# Altium PCB ESP32C3_REMOTE_SWITCH_PCB.PcbDoc
Units mm, origin at the board's own origin, x right, y up, seen from the top; angles counter-clockwise.
Board outline 35.18 x 25.53 mm, 2 copper layers (Top Layer, Bottom Layer); 39 components, 28 nets, 125 pads, 73 vias.
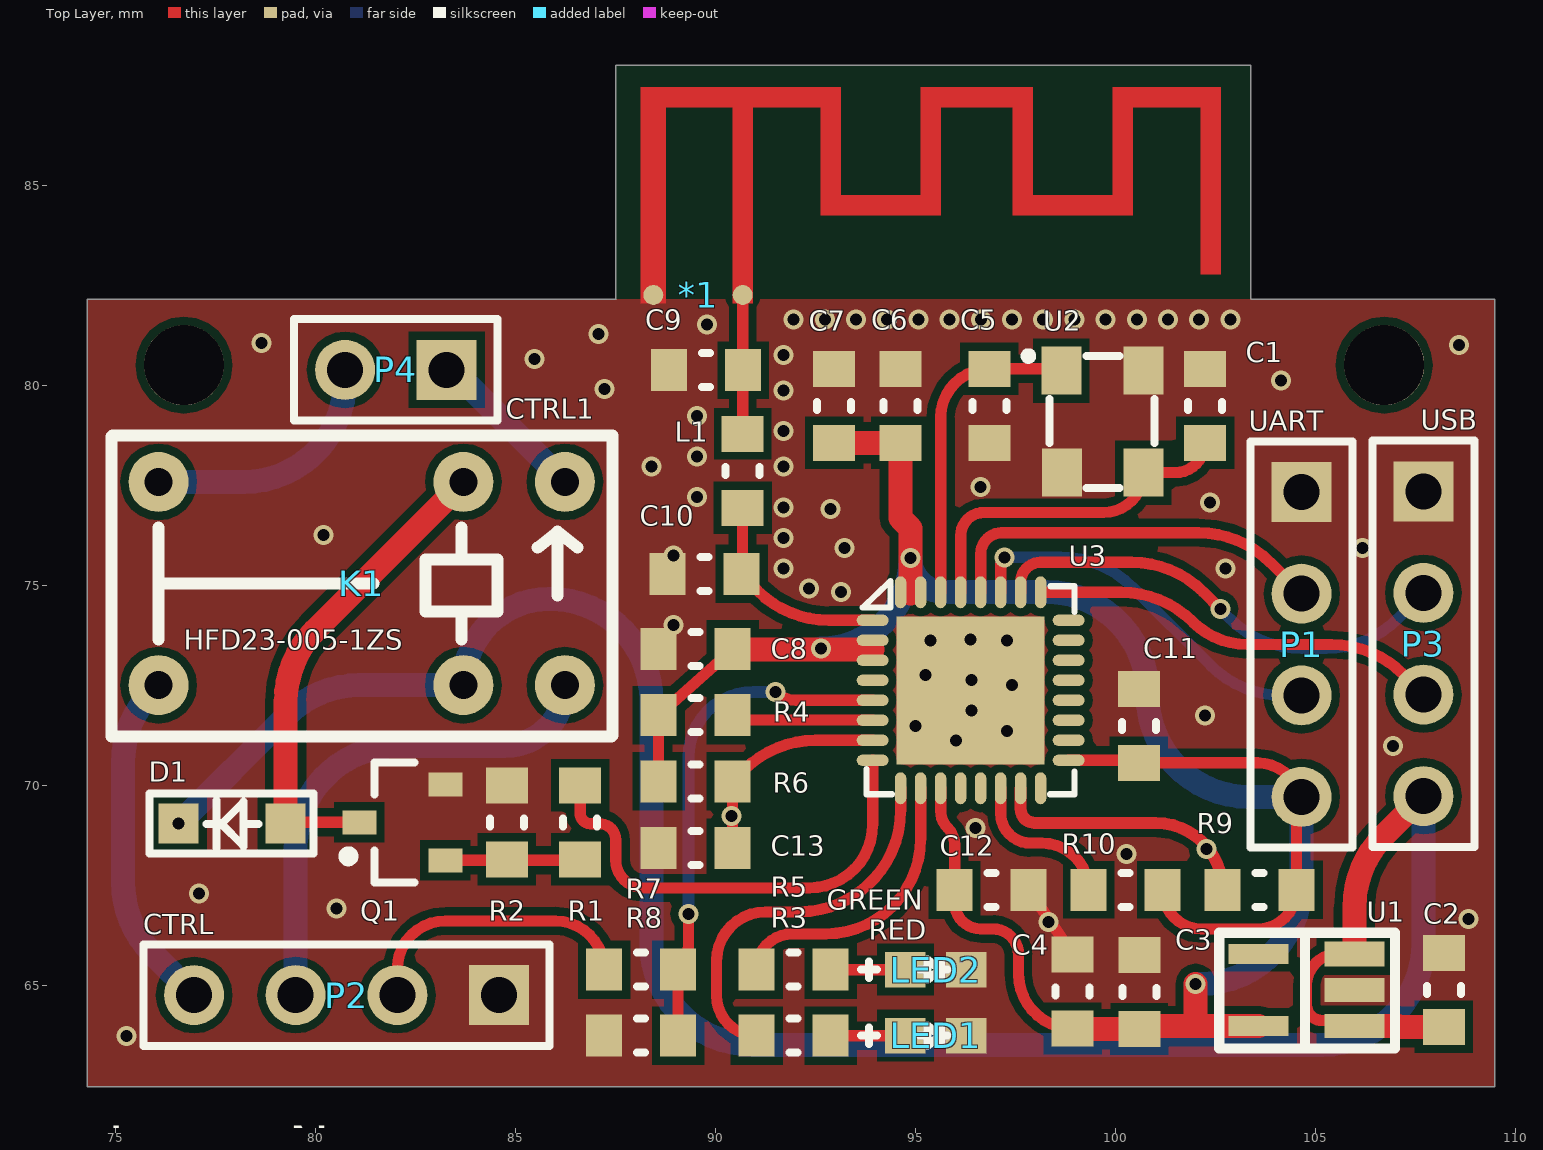
[diagram p0: Top Layer view]
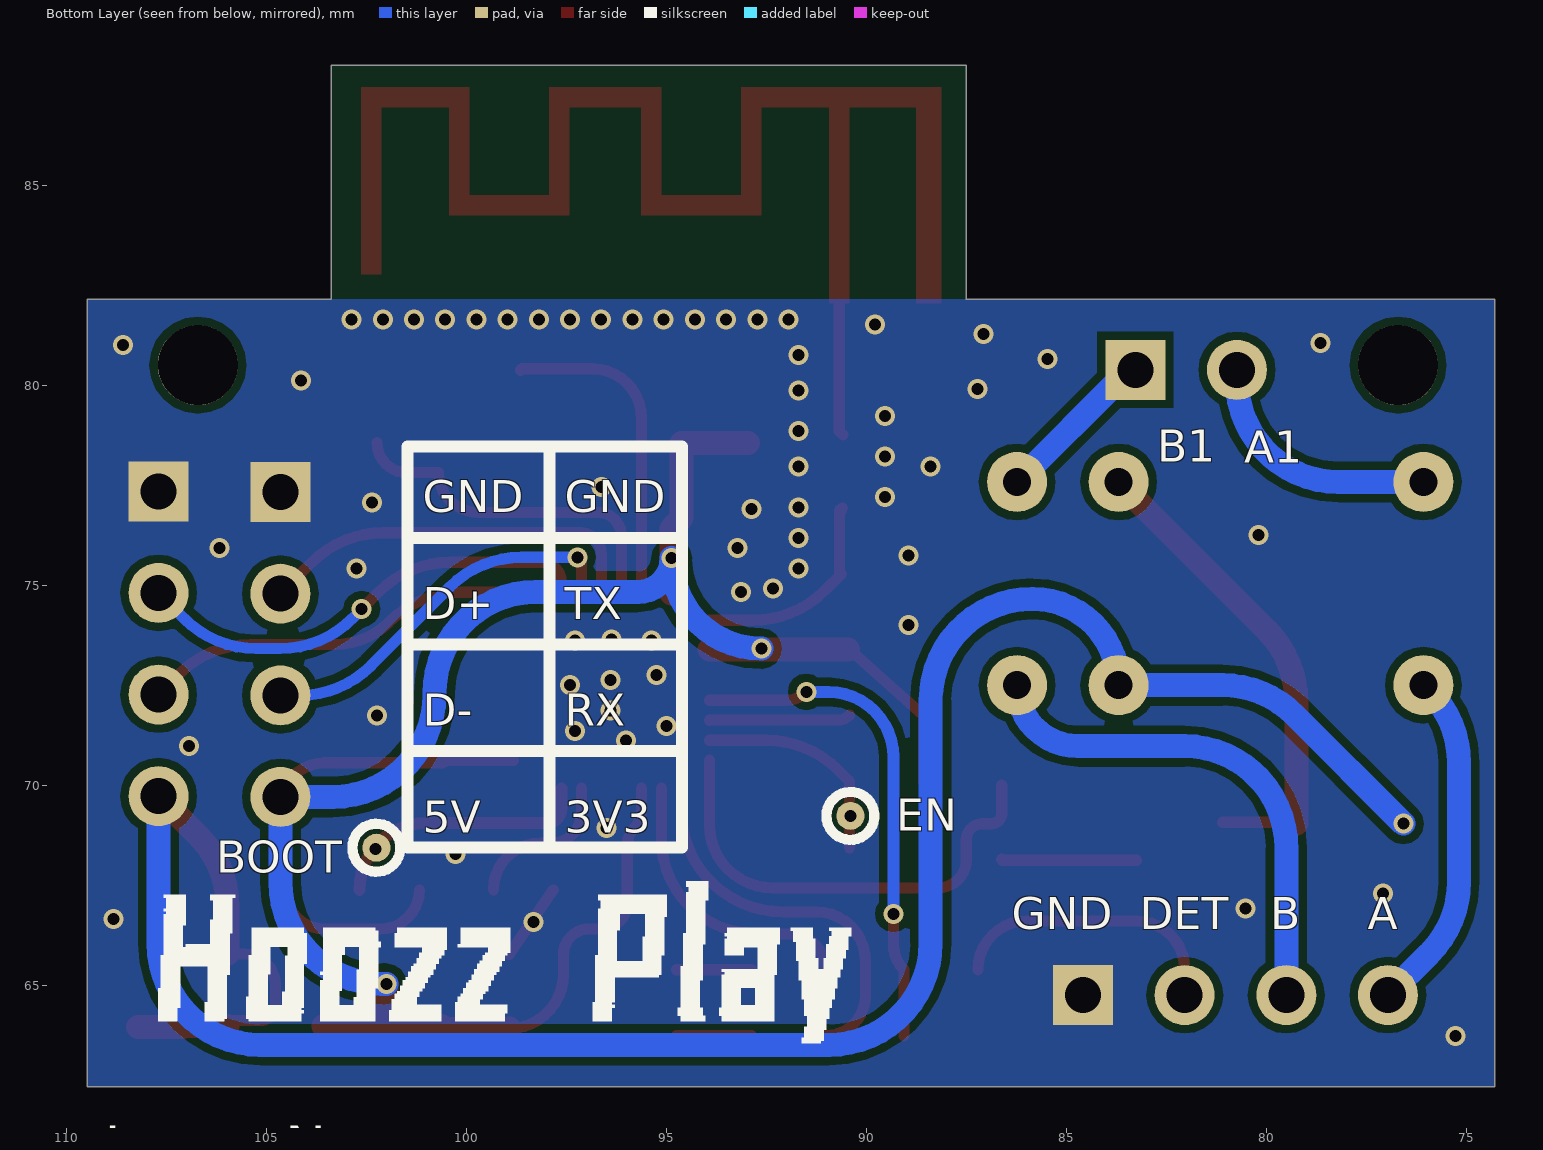
[diagram p1: Bottom Layer view, seen from below]

## Layer stack, top to bottom
Top Solder: solder mask 0.0102, Solder Resist, Dk 3.5
Top Layer: signal copper 0.0356
Dielectric 1: dielectric 0.32, FR-4, Dk 4.8
Bottom Layer: signal copper 0.0356
Bottom Solder: solder mask 0.0102, Solder Resist, Dk 3.5

## Board outline
74.295,62.484 74.295,82.169 87.503,82.169 87.503,88.011 103.378,88.011 103.378,82.169 109.474,82.169 109.474,62.484

## Design rules (kind name [scope] priority, off if disabled: settings)
Clearance [All] p1: gap=0.2 ignorepadtopadclearanceinfootprint=FALSE
ComponentClearance [All] p1: gap=0 collisioncheckmode=3 verticalgap=0 showdistances=FALSE
PlaneClearance [All] p1: clearance=0.2
PlaneConnect [All] p1: planeconnectstyle=Direct reliefexpansion=0.508 reliefentries=4 reliefconductorwidth=0.254 reliefairgap=0.254
PolygonConnect [All] p1: connectstyle=Direct reliefconductorwidth=0.254 reliefentries=4 polygonreliefangle="90 Angle" airgapwidth=0.254
RoutingVias [All] p1: holewidth=0.3 width=0.5 viastyle="Through Hole" minholewidth=0.3 minwidth=0.5 maxholewidth=1.2 maxwidth=2
SolderMaskExpansion [All] p1: expansion=0.102
UnRoutedNet [All] p1: checkbadconnections=TRUE
Width [All] p1: maxlimit=2.54 minlimit=0.28 preferedwidth=0.28
26 further rules are at their usual default settings.

## Components (designator, comment, footprint, x,y, rotation, side; value= is the part's Value field where it differs from the comment)
*1 "ANT" MINI_TI_ANT 90.678,82.296 r90 top
BOOT "TEST-PORT" TEST-PORT 102.25,68.453 r90 bottom
C1 "Cap" 0603 102.235,79.502 r90 top value=16pF
C2 "Cap" 0603 108.204,64.897 r270 top value=1uF
C3 "Cap" 0603 100.592,64.847 r270 top value=10uF
C4 "Cap" 0603 98.928,64.861 r270 top value=100nF
C5 "Cap" 0603 96.847,79.502 r90 top value=16pF
C6 "Cap" 0603 94.617,79.502 r270 top value=1uF
C7 "Cap" 0603 92.964,79.502 r270 top value=10nF
C8 "Cap" 0603 89.499,73.421 r0 top value=100nF
C9 "Cap" 0603 89.762,80.391 r180 top value=2.4pF
C10 "Cap" 0603 89.725,75.3 r0 top value=TBD/NC
C11 "Cap" 0603 100.584,71.501 r270 top value=100nF
C12 "Cap" 0603 96.901,67.399 r180 top value=100nF
C13 "Cap" 0603 89.499,68.45 r0 top value=1uF
D1 "S4" SOD-323 77.978,69.029 r180 top
EN "TEST-PORT" TEST-PORT 90.4,69.25 r180 bottom
K1 "HFD23-005-1ZS" Relay-HFD23 81.153,75.057 r90 top
L1 "Inductor" 0603 90.675,77.875 r270 top value=1.5nH
LED1 "RED" LED0603 95.504,63.754 r180 top
LED2 "GREEN" LED0603 95.504,65.405 r180 top
P1 "UART" HDR1X4 104.648,77.343 r270 top
P2 "CTRL" HDR1X4 84.582,64.77 r180 top
P3 "USB" HDR1X4 107.696,77.363 r270 top
P4 "CTRL1" HDR1X2 83.275,80.4 r180 top
Q1 "S8050/J3Y" SOT23_L 82.169,69.088 r180 top
R1 "Res" 0603 86.614,69.088 r90 top value=2K
R2 "Res" 0603 84.782,69.088 r90 top value=10K
R3 "Res" 0603 91.948,63.754 r180 top value=680R
R4 "Res" 0603 89.499,71.766 r180 top value=10K
R5 "Res" 0603 91.948,65.405 r180 top value=680R
R6 "Res" 0603 89.499,70.113 r180 top value=10K
R7 "Res" 0603 88.138,65.405 r0 top value=12k
R8 "Res" 0603 88.138,63.754 r180 top value=2k
R9 "Res" 0603 103.6,67.399 r0 top value=10K
R10 "Res" 0603 100.25,67.4 r0 top value=10K
U1 "ME6211-3.3" SOT-23-5 104.775,64.897 r90 top
U2 "40MHz" 3225 99.695,79.121 r270 top
U3 "ESP32-C3FH4AZ" QFN32_3.7X3.7 96.376,72.39 r0 top

## Footprints (in the part's own frame and the unit in brackets; to place one, negate y for a bottom-side part, rotate by r counter-clockwise, add the part's x,y. Pads: shape width x height; smd on the part's side, far side on the other; paste and mask are expansions set on the pad)
0603 [mm] "2-Leads, Body 2.00x1.00mm, IPC Medium Density"
  rect 0.9x1.05 smd: 1(-0.925,0) 2(0.925,0)
  silkscreen extent -0.1,-0.42 0.1,0.42, body extent -1,-0.5 1,0.5, height 0.6
3225 [mm]
  rect 1.2x1 smd: 1(-1.26,-1.05) 2(1.29,-1.04) 3(1.29,1) 4(-1.26,1)
  silkscreen extent -1.72,-1.97 1.67,1.27, body extent -1.63,-1.35 1.68,1.28, height 1
HDR1X2 [mm] "Connector; Header; 2 Position"
  rect 1.5x1.5 hole 0.9: 1(0,0)
  round 1.5 hole 0.9: 2(2.54,0)
  silkscreen extent -1.27,-1.27 3.81,1.27
HDR1X4 [mm] "Connector; Header; 4 Position"
  rect 1.5x1.5 hole 0.9: 1(0,0)
  round 1.5 hole 0.9: 2(2.54,0) 3(5.08,0) 4(7.62,0)
  silkscreen extent -1.27,-1.27 8.89,1.27
LED0603 [mil]
  rect 40x35 smd: 1(29.92,0) 2(-29.92,0)
  silkscreen extent -12,-10 74,10, body extent -34,-17 37,16, height 20
MINI_TI_ANT [mm]
  rrect100% 0.5x0.5 smd: 1(-0.023,0) 2(-0.023,2.236)
  Top Layer region: 4.926,2.549 -0.227,2.549 -0.227,1.922 4.926,1.922 4.926,2.549
  Top Layer region: 4.673,2.549 5.173,2.549 5.173,-2.451 2.473,-2.451 2.473,-4.451 5.173,-4.451 5.173,-7.251 2.473,-7.251 2.473,-9.251 5.173,-9.251 5.173,-11.951 0.5,-11.951 0.5,-11.451 4.673,-11.451 4.673,-9.751 1.973,-9.751 1.973,-6.751 4.673,-6.751 4.673,-4.951 1.973,-4.951 1.973,-1.951 4.673,-1.951 4.673,-0.251 -0.227,-0.251 -0.227,0.249 4.673,0.249 4.673,2.549
QFN32_3.7X3.7 [mm]
  oval 0.8x0.28 smd: 1(-2.45,1.75) 2(-2.45,1.25) 3(-2.45,0.75) 4(-2.45,0.25) 5(-2.45,-0.25) 6(-2.45,-0.75) 7(-2.45,-1.25) 8(-2.45,-1.75) 17(2.45,-1.75) 18(2.45,-1.25) 19(2.45,-0.75) 20(2.45,-0.25) 21(2.45,0.25) 22(2.45,0.75) 23(2.45,1.25) 24(2.45,1.75)
  oval 0.28x0.8 smd: 9(-1.75,-2.45) 10(-1.25,-2.45) 11(-0.75,-2.45) 12(-0.25,-2.45) 13(0.25,-2.45) 14(0.75,-2.45) 15(1.25,-2.45) 16(1.75,-2.45) 25(1.75,2.45) 26(1.25,2.45) 27(0.75,2.45) 28(0.25,2.45) 29(-0.25,2.45) 30(-0.75,2.45) 31(-1.25,2.45) 32(-1.75,2.45)
  rect 3.7x3.7 smd: 33(0,0)
  silkscreen extent -2.71,-2.6 2.6,2.73, body extent -2.35,-2.35 2.42,2.4, height 0.8
Relay-HFD23 [mm] "HFD23-005-1ZS"
  round 1.5 hole 0.7: 1(-2.54,5.08) 2(-2.54,-2.54) 3(-2.54,-5.08) 4(2.54,-5.08) 5(2.54,-2.54) 6(2.54,5.08)
  silkscreen extent -3.82,-6.28 3.7,6.25, body extent -3.83,-6.25 3.7,6.25, height 10
SOD-323 [mm]
  rect 1x1 smd: 1(-1.275,-0.025) 2(1.4,-0.025)
  silkscreen extent -1.98,-0.78 2.13,0.73, body extent -1.22,-0.6 1.38,0.55, height 0.8
SOT23_L [mm] "SOT23, 3-Leads, Body 2.9x1.3mm, Pitch 0.95mm, Lead Span 2.3mm - Reverse Pinning, IPC High Density"
  rect 0.85x0.6 smd: 1(-1.075,0.95) 2(-1.075,-0.95) 3(1.075,0)
  silkscreen extent -0.3,-1.5 1.47,1.5, body extent -0.7,-1.5 0.7,1.5, height 1.1
SOT-23-5 [mm]
  rect 0.6x1.5 smd: 1(-0.9,-1.2) 2(0,-1.2)
  rect 0.63x1.5 smd: 3(0.9,-1.2)
  rect 0.5x1.5 smd: 4(0.9,1.2) 5(-0.9,1.2)
  silkscreen extent -1.47,-2.21 1.43,2.18, body extent -1.38,-0.95 1.3,0.9, height 1
TEST-PORT [mm] "Test port"
  round 0.7 smd: T(0,0)
  silkscreen extent -0.6,-0.6 0.6,0.6

## Part data
C1 C2 C3 C4 C5 C6 C7 C8 C9 C10 C11 C12 C13: "Capacitor", LatestRevisionDate=17-Jul-2002, LatestRevisionNote="Re-released for DXP Platform.", PackageDescription="Radial Cap, Thru-Hole; 2 Leads; 0.3 in Pin Spacing", PackageReference=RAD-0.3, Published=8-Jun-2000, Publisher="Altium Limited"
D1: library part "D Schottky", "Schottky Diode", Code_JEDEC=DO-214-AA, LatestRevisionDate=17-Jul-2002, LatestRevisionNote="Re-released for DXP Platform.", PackageDescription="DO-214-AA/SMB; 2 C-Bend Leads; Body 5.3 x 3.6 mm, inc. leads (LxW)", PackageReference=SMB, Published=8-Jun-2000, Publisher="Altium Limited"
K1: library part Relay-HFD23, LatestRevisionDate=17-Jul-2002, LatestRevisionNote="Re-released for DXP Platform.", PackageReference=MODULE4, Published=24-Mar-1999, Publisher="Altium Limited"
LED1 LED2: library part LED
P1 P2 P3: library part "Header 4", "Header, 4-Pin", LatestRevisionDate=17-Jul-2002, LatestRevisionNote="Re-released for DXP Platform.", Publisher="Altium Limited"
P4: library part "Header 2", "Header, 2-Pin", LatestRevisionDate=17-Jul-2002, LatestRevisionNote="Re-released for DXP Platform.", Publisher="Altium Limited"
Q1: library part NPN, Code_JEDEC=TO-226-AA, LatestRevisionDate=17-Jul-2002, LatestRevisionNote="Re-released for DXP Platform.", PackageDescription="TO, Flat Index; 3 In-Line, Axial Leads; Body Dia. 4.8mm; Leads 0.55 x 0.51 mm (max)", PackageReference=TO-226-AA, Published=8-Jun-2000, Publisher="Altium Limited"
R1 R2 R3 R4 R5 R6 R7 R8 R9 R10: "Resistor", LatestRevisionDate=29-May-2009, LatestRevisionNote="IPC-7351 Footprint Added.", PackageDescription="Chip Resistor", PackageReference=J1-0603, Published=8-Jun-2000, Publisher="Altium Limited"
U1: Manufacturer="Texas Instruments", Manufacturer_Part_Number=REG102NA-2.5/250, Built_By=EMA_UL_Team, Copyright="Copyright (C) 2018 Accelerated Designs. All rights reserved", RefDes=RefDes, SourceLibrary=TI_2016-07-06, Type=DEV, Vendor="Texas Instruments"
U2: library part XTAL2
L1: Code_IEC=1005, Code_JEITA=0402, LatestRevisionDate=29-May-2009, LatestRevisionNote="IPC-7351 Footprint Added.", PackageDescription="Chip Inductor", PackageReference=0402-A, Published=8-Jun-2000, Publisher="Altium Limited"

## Free pads (board coordinates)
  round 2 hole 2 unplated: ""(76.708,80.518) ""(106.713,80.518)

## Via types
v1: diameter 0.5, hole 0.3, Top Layer to Bottom Layer, 73 vias

## Nets (pads, with @x,y where several pads share a name; then routed paths per layer and width w, separated by ;. In a path a pad name is that pad's centre, name@x,y a point inside that pad or via, vN(x,y) a via of type N, cw(c..) or ccw(c..) an arc to the next point about the centre after c; other vN are vias at no path point)
CTRL: R1.2 U3.8 | length 11.8
  Top Layer w0.28: R1.2 86.614,69.315 ccw(c86.875,69.315) 86.875,69.054 87.099,69.054 cw(c87.099,68.65) 87.503,68.65 87.503,68.147 ccw(c88.2,68.147) 88.2,67.45 92.342,67.45 ccw(c92.342,69.034) 93.926,69.034 U3.8
DET: R7.2 R8.1 | length 12.6
  Top Layer w0.28: R8.1 R7.2 ccw(c88.431,66.037) 89.325,66.037 v1(89.325,66.8) ; v1(91.5,72.35) ccw(c92.007,72.857) 92.007,72.14 93.926,72.14
  Bottom Layer w0.3: v1(89.325,66.8) 89.325,70.725 cw(c90.95,70.725) 90.95,72.35 v1(91.5,72.35)
GND: *1.2 C1.2 C2.1 C3.1 C4.1 C5.1 C6.1 C7.1 C8.1 C9.2 C10.1 C11.1 C12.1 C13.1 LED1.2 LED2.2 P1.1 P2.1 P3.1 Q1.2 R2.2 R8.2 U1.2 U2.2 U2.4 | length 2
  Top Layer w0.28: C12.1 C4.1
  other v1: 75.275,63.75 98.325,66.6 108.825,66.675 80.518,66.929 77.089,67.31 100.275,68.3 96.5,68.95 106.934,70.993 102.235,71.755 88.95,74.025 93.129,74.846 92.329,74.93 91.694,75.438 102.743,75.438 88.95,75.761 93.218,75.946 106.172,75.946 91.694,76.2 80.2,76.275 92.873,76.926 91.694,76.962 102.362,77.089 89.535,77.216 96.626,77.47 88.392,77.978 91.694,77.978 89.535,78.232 91.694,78.867 89.535,79.248 91.694,79.883 87.225,79.925 104.14,80.137 85.475,80.675 91.694,80.772 108.585,81.026 78.65,81.075 87.075,81.3 89.789,81.534 91.948,81.661 92.728,81.661 93.508,81.661 94.288,81.661 95.069,81.661 95.849,81.661 96.629,81.661 97.409,81.661 98.189,81.661 98.969,81.661 99.749,81.661 100.53,81.661 101.31,81.661 102.09,81.661 102.87,81.661
LED1: R3.2 U3.9 | length 9.7
  Top Layer w0.28: R3.2 cw(c91.023,64.752) 90.025,64.752 90.025,65.625 cw(c91.25,65.625) 91.25,66.85 92.086,66.85 ccw(c92.086,69.39) 94.626,69.39 U3.9
LED2: R5.2 U3.10 | length 7.2
  Top Layer w0.28: R5.2 cw(c91.918,65.405) 91.918,66.3 92.751,66.3 ccw(c92.751,68.675) 95.126,68.675 U3.10
Net*1_1: *1.1 C9.1 L1.1 | length 3.5
  Top Layer w0.28: L1.1@90.587,78.776 90.678,78.867 *1.1
NetBOOT_T: BOOT.T R9.1 U3.15 | length 6.7
  Top Layer w0.3: U3.15 97.626,69.424 ccw(c97.975,69.424) 97.975,69.075 100.999,69.075 cw(c100.999,67.399) R9.1
  other v1: 102.275,68.425
NetC1_1: C1.1 U2.3 U3.29 | length 8.8
  Top Layer w0.28: U3.29 96.126,76.251 cw(c96.71,76.251) 96.71,76.835 99.699,76.835 ccw(c99.699,77.831) U2.3 101.489,77.831 ccw(c101.489,78.577) C1.1
NetC5_2: C5.2 U2.1 U3.30 | length 8.1
  Top Layer w0.28: U3.30 95.626,79.206 cw(c96.847,79.206) C5.2 98.599,80.427 cw(c98.599,80.381) U2.1
NetC10_2: C10.2 L1.2 U3.1 | length 5.3
  Top Layer w0.28: L1.2@90.6,76.95 cw(c90.54,76.89) L1.2@90.625,76.89 ; C10.2@90.625,75.3 91.041,74.884 ccw(c92.837,76.68) 92.837,74.14 U3.1 ; C10.2@90.675,75.3 L1.2@90.675,76.89
NetC13_2: C13.2 EN.T R6.1 | length 5.5
  Top Layer w0.28: C13.2 R6.1 90.707,70.396 cw(c92.503,68.6) 92.503,71.14 93.926,71.14
  other v1: 90.4,69.25
NetD1_1: D1.1 K1.5 Q1.3 | length 12.1
  Top Layer w0.28: D1.1@79.253,69.088 Q1.3
  Top Layer w0.6: D1.1 79.253,69.088 79.253,72.105 cw(c81.793,72.105) 79.997,73.901 K1.5
NetLED1_1: LED1.1 R3.1 | length 1.9
  Top Layer w0.28: R3.1 LED1.1
NetLED2_1: LED2.1 R5.1 | length 1.9
  Top Layer w0.28: R5.1 LED2.1
NetQ1_1: Q1.1 R1.1 R2.1 | length 3.4
  Top Layer w0.28: Q1.1 86.589,68.138 ccw(c86.589,68.163) R1.1
NetR4_1: R4.1 U3.6 | length 3.5
  Top Layer w0.28: R4.1 ccw(c90.716,72.058) 90.716,71.645 93.498,71.645 ; 93.492,71.65 U3.6
NetR10_1: R10.1 U3.14 | length 3.9
  Top Layer w0.28: U3.14 97.126,69.318 ccw(c97.875,69.318) 97.875,68.569 98.156,68.569 cw(c98.156,67.4) R10.1
PORT_A: K1.1 P2.4 | length 8.6
  Bottom Layer w0.6: K1.1 75.928,72.372 ccw(c77.724,70.576) 75.184,70.576 75.184,67.6 ccw(c77.724,67.6) 75.928,65.804 P2.4
PORT_A1: K1.6 P4.2 | length 6.4
  Bottom Layer w0.6: K1.6 78.195,77.597 ccw(c78.195,80.137) 80.735,80.137 P4.2
PORT_B: K1.3 P2.3 | length 12.7
  Bottom Layer w0.6: P2.3 79.502,68.453 cw(c82.042,68.453) 82.042,70.993 84.709,70.993 ccw(c84.709,72.517) K1.3
PORT_B1: K1.4 P4.1 | length 4.1
  Bottom Layer w0.6: P4.1 cw(c83.275,80.026) 83.54,80.29 K1.4
PORT_DET: P2.2 R7.1 | length 7.2
  Top Layer w0.28: P2.2 82.042,65.422 cw(c83.244,65.422) 83.244,66.624 85.994,66.624 cw(c85.994,65.405) R7.1
UART_RX: P1.3 U3.27 | length 9.5
  Top Layer w0.28: U3.27 97.126,75.474 cw(c97.467,75.474) v1(97.226,75.715)
  Bottom Layer w0.28: v1(97.226,75.715) 98.62,75.715 cw(c98.62,73.175) 100.416,74.971 102.38,73.007 ccw(c104.176,74.803) 104.176,72.263 P1.3
UART_TX: P1.2 U3.28 | length 9.8
  Top Layer w0.28: U3.28 96.626,75.798 cw(c97.155,75.798) 97.155,76.327 102.072,76.327 cw(c102.072,73.787) 103.868,75.583 P1.2
USB_D+: P3.2 U3.26 | length 11.7
  Top Layer w0.28: U3.26 97.626,75.09 cw(c98.126,75.09) 98.126,75.59 100.396,75.59 cw(c100.396,73.05) 102.192,74.846 v1(102.616,74.422)
  Bottom Layer w0.28: v1(102.616,74.422) 102.863,74.175 ccw(c104.659,75.971) 104.659,73.431 105.252,73.431 ccw(c105.252,75.971) 107.048,74.175 P3.2
USB_D-: P3.3 U3.25 | length 10.4
  Top Layer w0.28: U3.25@98.126,74.803 U3.25 100.138,74.84 cw(c100.138,72.3) 101.934,74.096 ccw(c103.293,75.455) 103.293,73.533 105.394,73.533 cw(c105.394,70.993) 107.19,72.789 P3.3
VDD3V3: C3.2 C4.2 C6.2 C7.2 C8.2 C11.2 C12.2 P1.4 R4.2 R6.2 R9.2 R10.2 U1.5 U3.2 U3.3 U3.11 U3.17 U3.31 U3.32 | length 62.8
  Top Layer w0.28: R6.2 R4.2 C8.2 ; U3.11 95.626,69.371 ccw(c96.221,69.371) 95.8,68.95 cw(c95.375,68.525) 95.976,68.525 C12.2 95.976,67.074 ccw(c96.625,67.074) 96.625,66.425 96.925,66.425 cw(c96.925,65.775) 97.575,65.775 97.575,65.289 ccw(c98.928,65.289) C4.2 ; U3.17 100.429,70.64 cw(c100.429,70.421) C11.2 103.541,70.576 cw(c103.541,69.469) 104.608,69.763 cw(c103.541,69.469) 104.648,69.469 ccw(c104.648,69.346) 104.525,69.346 R9.2 cw(c103.551,67.399) 103.551,66.425 102.15,66.425 cw(c102.15,67.4) R10.2
  Top Layer w0.6: C8.2@90.46,73.406 93.926,73.406 ; C7.2 C6.2 94.617,76.691 94.869,76.439 v1(94.869,75.692) 94.869,74.803 ; C4.2 98.928,63.922 C3.2 ; C3.2@100.592,63.972 100.617,63.997 102,63.997 ; v1(102,65.05) 102,63.997 ; U1.5 102,63.997
  Bottom Layer w0.6: v1(92.628,73.431) ccw(c92.628,75.672) v1@94.869,75.672 ; v1(102,65.05) 102.108,65.05 ccw(c102.108,67.59) 104.648,67.59 P1.4 103.34,69.723 cw(c103.34,72.263) 100.8,72.263 100.8,72.31 ccw(c98.26,72.31) 98.26,74.85 95.711,74.85 cw(c95.711,75.692) v1@94.869,75.672 ; v1@94.869,75.672 cw(c95.711,75.692) v1(94.869,75.692) v1@94.869,75.672
VDD5V: C2.2 D1.2 K1.2 P3.4 U1.1 U1.3 | length 58.2
  Top Layer w0.28: U1.3@105.969,65.797 105.548,65.797 ccw(c105.548,65.024) 104.775,65.024 104.775,64.516 ccw(c105.156,64.516) 105.156,64.135 105.837,64.135 cw(c105.837,63.997) U1.1
  Top Layer w0.6: U1.3@105.969,65.797 105.969,66.964 cw(c108.509,66.964) 106.713,68.76 P3.4 ; U1.1 107.061,63.997 107.086,63.972 C2.2
  Bottom Layer w0.6: v1(76.578,69.054) 79.297,71.773 cw(c81.093,69.977) 81.093,72.517 K1.2 cw(c85.852,72.517) 85.852,74.676 cw(c85.852,72.136) 88.392,72.136 88.392,66.065 ccw(c90.932,66.065) 90.932,63.525 105.156,63.525 ccw(c105.156,66.065) 107.696,66.065 P3.4
pads on no net: U1.4 U3.4 U3.5 U3.7 U3.12 U3.13 U3.16 U3.18 U3.19 U3.20 U3.21 U3.22 U3.23 U3.24 U3.33
copper on no net:
  other v1: 96.012,71.14 97.282,71.374 94.996,71.501 96.393,71.882 97.409,72.517 96.393,72.644 95.25,72.771 95.377,73.64 97.282,73.64 96.376,73.66

## Polygon pours and split planes (outlines as drawn)
GND on Bottom Layer "GND_L02_P020" (solid, remove dead copper, pour order 20): 74.295,62.484 74.295,82.169 87.503,82.169 87.503,88.011 103.378,88.011 103.378,82.169 109.474,82.169 109.474,62.484
GND on Top Layer "GND_L01_P021" (solid, remove dead copper, pour order 21): 74.295,62.484 74.295,82.169 87.503,82.169 87.503,88.011 103.378,88.011 103.378,82.169 109.474,82.169 109.474,62.484

## Other copper
Top Layer:
  pour cut-out: 87.503,88.011 103.378,88.011 103.378,82.169 87.503,82.169
Bottom Layer:
  pour cut-out: 87.503,88.011 103.378,88.011 103.378,82.169 87.503,82.169

## Silkscreen, mask and mechanical layers (free items; w line width, h text height)
Top Overlay:
  text ".Layer_Name" at 74.375,60.5 h1
Bottom Overlay:
  drawing of 21 lines, arcs and shapes, not listed
  text "B1" at 82.725,78.1 h0.8
  text "A1" at 80.55,78.075 h0.8
  text "GND" at 97.536,76.835 h0.8
  text "GND" at 101.092,76.835 h0.8
  text "TX" at 97.536,74.168 h0.8
  text "D+" at 101.092,74.168 h0.8
  text "RX" at 97.536,71.501 h0.8
  text "D-" at 101.092,71.501 h0.8
  text "3V3" at 97.536,68.834 h0.8
  text "5V" at 101.092,68.834 h0.8
  text "A" at 77.47,66.421 h0.8
  text "B" at 79.9,66.421 h0.8
  text "DET" at 83.168,66.421 h0.8
  text "GND" at 86.36,66.421 h0.8
  text ".Layer_Name" at 109.475,60.5 h1
Mechanical 1:
  the board outline again, w0.2